# Allegro board RAK833_RPIGATEWAY.brd
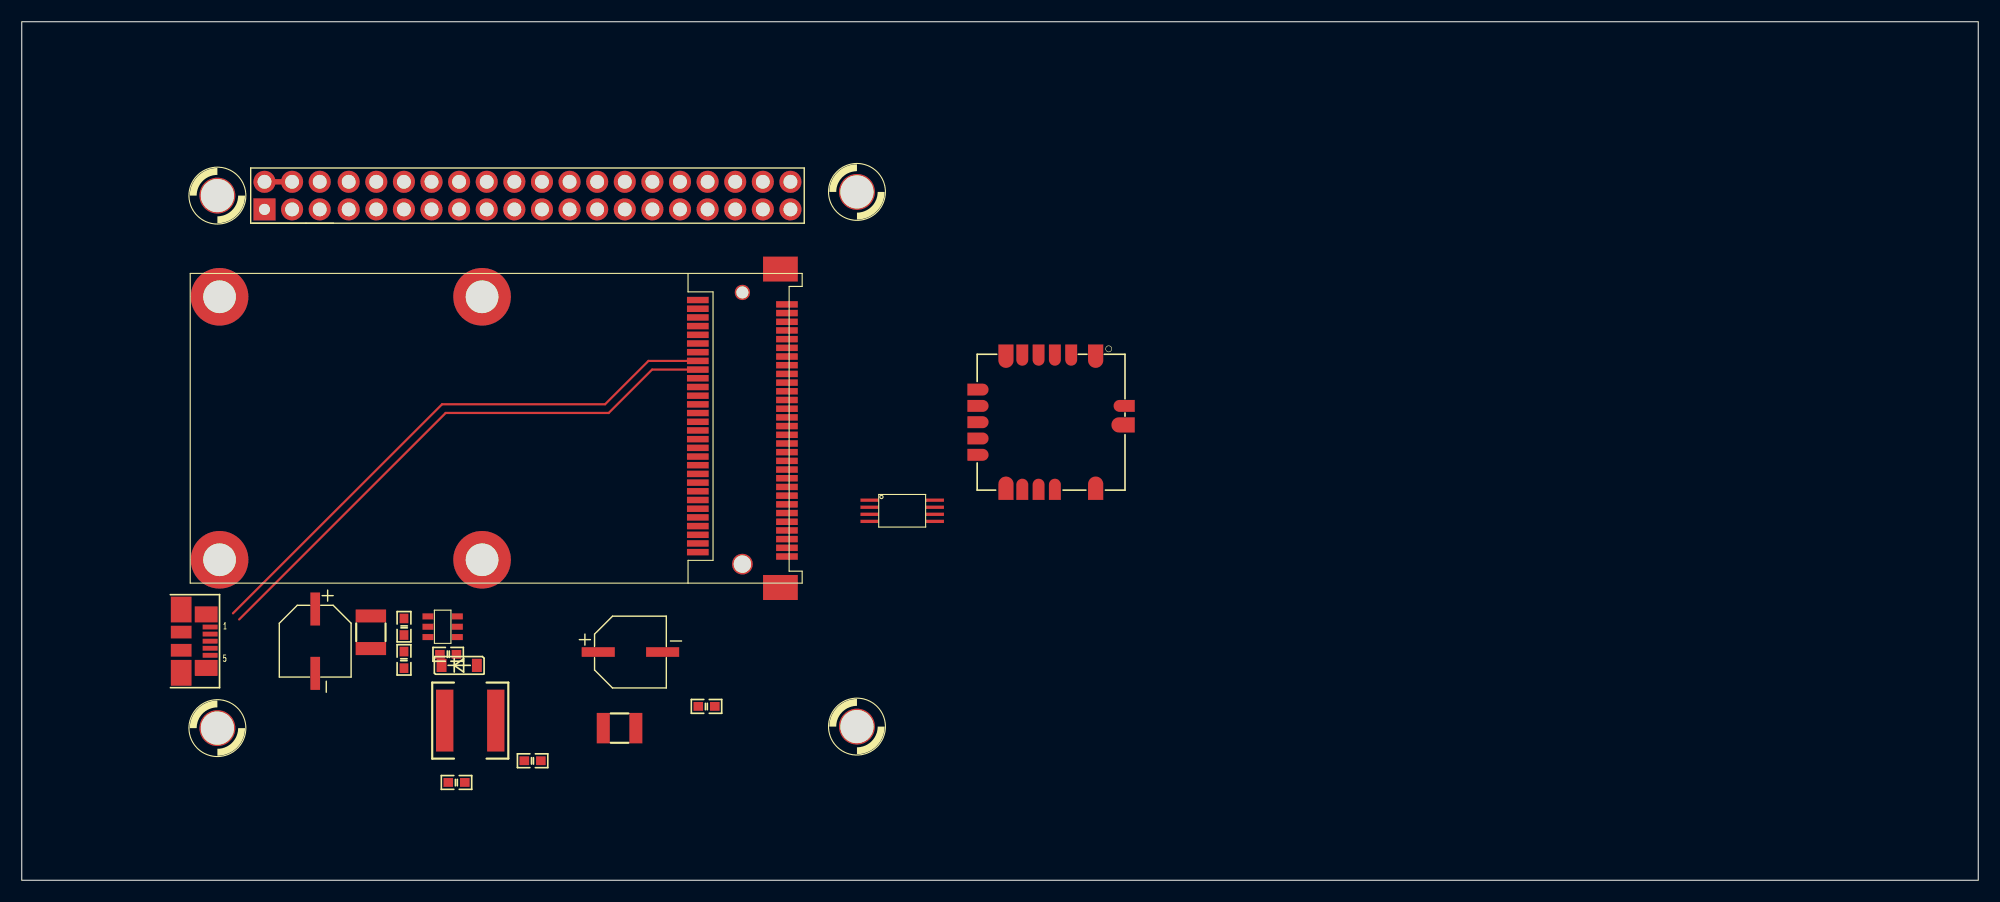
[diagram p0: board, top side]
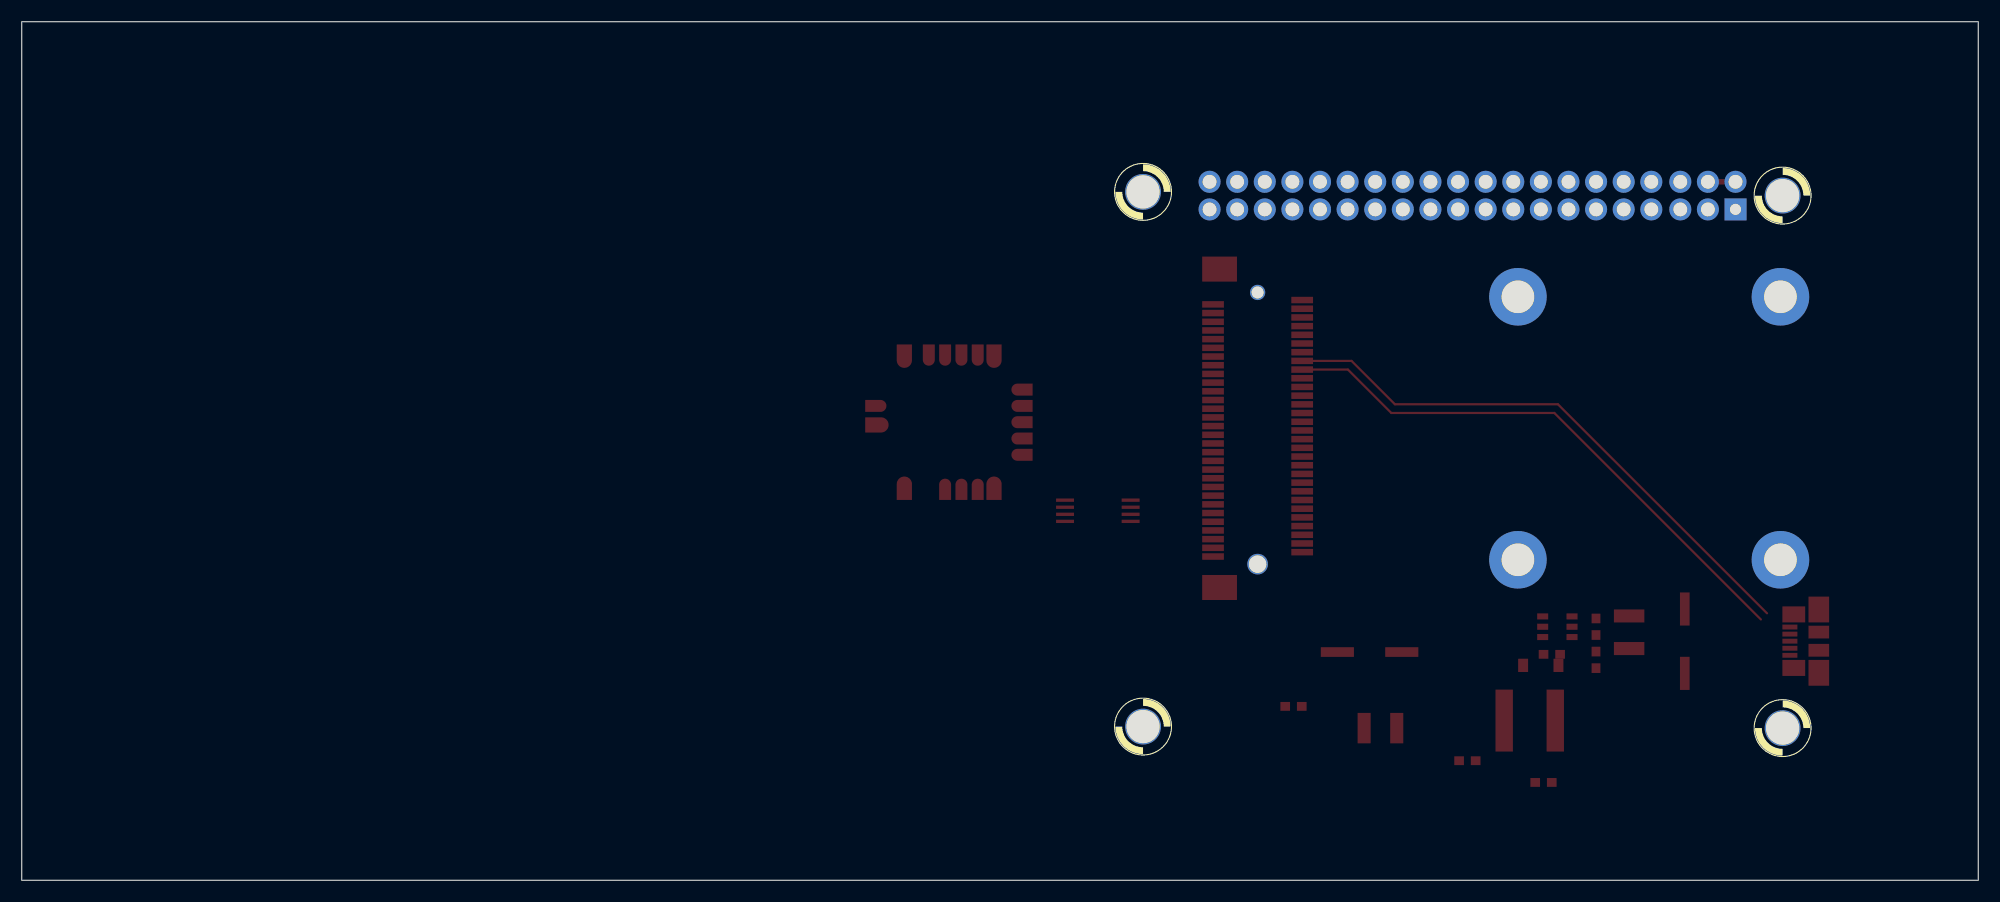
[diagram p1: board, bottom side, seen from below]

Outline 180 x 79 mm; copper layers: TOP, BOTTOM. Coordinates in mm from the lower left corner of the outline.
Outline path: rectangle 0,0 180,79

## Design rules (mm)
constraint set DEFAULT: min track width 0.203

## Placement (name value [footprint] x y rotation side)
C1  10nF  [C0603]  39.23 20.79 180 top
C2  100uF/35V  [CAP_AL_D]  27 22 270 top
C3  100nF  [C0603]  35.17 20.28 270 top
C4  10u/35V  [CAP_1210]  32.12 22.82 270 top
C5  22u/6.3V  [CAP_1210]  55 14 0 top
C6  220u/16V  [CAP_AL_D]  56 21 0 top
C7  100nF  [C0603]  63 16 0 top
D1  1N5819  [SOD123]  40.25 19.77 0 top
J1  HEADER 20X2  [HEADER40X2PITCH100MIL]  25 63 90 top
J2  HUM011D-5-S  [CON5_MICROUSB_SKT_SM]  16 22 0 top
L1  8.8uH/1.7A  [IND_6X6MM]  41.26 14.69 0 top
MH1  HOLE 4mm  [MH_3MM_1]  18 63 0 top
MH2  HOLE 4mm  [MH_3MM_1]  18 14 0 top
MH3  HOLE 4mm  [MH_3MM_1]  76.84 14.14 0 top
MH4  HOLE 4mm  [MH_3MM_1]  76.84 63.34 0 top
R1  10K  [R0603]  35.17 23.33 90 top
R2  30K  [R0603]  40 9 0 top
R3  10K  [R0603]  47 11 0 top
U1  AP3211  [SOT23-6]  38.72 23.33 180 top
U2  RAK_PCIE  [CONN_PCIE_52POS]  66.3 37.74 90 top
U3  ZM5202  [ZM5202_A]  87 35 0 top
U4  CAT25256  [TSSOP-8]  81 34 0 top

## Library data of the parts
C1 = CAP NP
C2 C6 = CAP
C3 C7 = Cap 0603
C4 C5 = CAP NP: User Part Number: PartNr
D1 = SS34_2
J1 = HEADER 20X2
J2 = USB MIN_6
L1 = INDUCTOR
MH1-MH4 = MOUNTING HOLE
R1-R3 = RES-SM0402_0
U1 = PMIC_SOT23-6
U2 = RAK_PCIE
U3 = ZM5202
U4 = CAT25C02_0

## Footprints (pads in the part's own frame, mm; a bottom-side part is the same pattern mirrored in y, then rotated)
C0603
  rect 0.889x0.813 smd: 1(-0.762,0) 2(0.762,0)
CAP_1210
  rect 1.2x2.8 smd: 1(-1.5,0) 2(1.5,0)
CAP_AL_D
  rect 3.048x0.889 smd: 1(-2.962,0) 2(2.962,0)
CON5_MICROUSB_SKT_SM
  rect 1.38x0.45 smd: 1(1.33,1.3) 2(1.33,0.65) 3(1.33,0) 4(1.33,-0.65) 5(1.33,-1.3)
  rect 1.9x1.175 smd: 6(-1.33,0.837) 11(-1.33,-0.837)
  rect 1.9x2.375 smd: 7(-1.33,2.913) 10(-1.33,-2.913)
  rect 2.1x1.475 smd: 8(0.97,2.463) 9(0.97,-2.463)
CONN_PCIE_52POS
  rect 2.301x3.2 smd: (-10.8,-3.5) (18.499,-3.5)
  round 1.905 hole 1.6 unplated: (-8.651,0)
  round 5.301 hole 3: (-8.25,48.1) (-8.25,23.95) (15.949,48.1) (15.949,23.95)
  round 1.405 hole 1.1 unplated: (16.35,0)
  rect 0.599x1.999 smd: 1(-7.95,-4.1) 2(-7.549,4.1) 3(-7.15,-4.1) 4(-6.749,4.1) 5(-6.35,-4.1) 6(-5.951,4.1) 7(-5.55,-4.1) 8(-5.151,4.1) 9(-4.75,-4.1) 10(-4.351,4.1) 11(-3.95,-4.1) 12(-3.551,4.1) 13(-3.15,-4.1) 14(-2.751,4.1) 15(-2.349,-4.1) 16(-1.951,4.1) 17(1.651,-4.1) 18(2.05,4.1) 19(2.451,-4.1) 20(2.85,4.1) 21(3.251,-4.1) 22(3.65,4.1) 23(4.051,-4.1) 24(4.45,4.1) 25(4.851,-4.1) 26(5.25,4.1) 27(5.652,-4.1) 28(6.05,4.1) 29(6.452,-4.1) 30(6.85,4.1) 31(7.252,-4.1) 32(7.651,4.1) 33(8.052,-4.1) 34(8.451,4.1) 35(8.852,-4.1) 36(9.251,4.1) 37(9.652,-4.1) 38(10.051,4.1) 39(10.452,-4.1) 40(10.851,4.1) 41(11.252,-4.1) 42(11.651,4.1) 43(12.052,-4.1) 44(12.451,4.1) 45(12.852,-4.1) 46(13.251,4.1) 47(13.65,-4.1) 48(14.049,4.1) 49(14.45,-4.1) 50(14.849,4.1) 51(15.25,-4.1) 52(15.649,4.1) A1(-1.549,-4.1) A2(-1.151,4.1) A3(-0.749,-4.1) A4(-0.35,4.1) A5(0.051,-4.1) A6(0.45,4.1) A7(0.851,-4.1) A8(1.25,4.1)
HEADER40X2PITCH100MIL
  rect 2.032x2.032 hole 1.016: 1(-1.27,2.667)
  round 2.032 hole 1.27: 2(1.27,2.667) 3(-1.27,0.127) 4(1.27,0.127) 5(-1.27,-2.413) 6(1.27,-2.413) 7(-1.27,-5.08) 8(1.27,-5.08) 9(-1.27,-7.62) 10(1.27,-7.62) 11(-1.27,-10.16) 12(1.27,-10.16) 13(-1.27,-12.7) 14(1.27,-12.7) 15(-1.27,-15.24) 16(1.27,-15.24) 17(-1.27,-17.78) 18(1.27,-17.78) 19(-1.27,-20.32) 20(1.27,-20.32) 21(-1.27,-22.86) 22(1.27,-22.86) 23(-1.27,-25.4) 24(1.27,-25.4) 25(-1.27,-27.94) 26(1.27,-27.94) 27(-1.27,-30.48) 28(1.27,-30.48) 29(-1.27,-33.02) 30(1.27,-33.02) 31(-1.27,-35.56) 32(1.27,-35.56) 33(-1.27,-38.1) 34(1.27,-38.1) 35(-1.27,-40.64) 36(1.27,-40.64) 37(-1.27,-43.18) 38(1.27,-43.18) 39(-1.27,-45.72) 40(1.27,-45.72)
IND_6X6MM
  rect 1.6x5.7 smd: 1(-2.35,0) 2(2.35,0)
MH_3MM_1
  round 3.302 hole 3.048: 1(0,0)
R0603
  rect 0.889x0.813 smd: 1(-0.762,0) 2(0.762,0)
SOD123
  rect 0.914x1.219 smd: 1(1.626,0) 2(-1.626,0)
SOT23-6
  rect 1.016x0.559 smd: 1(-1.35,0.95) 2(-1.35,0) 3(-1.35,-0.95) 4(1.35,-0.95) 5(1.35,0) 6(1.35,0.95)
TSSOP-8
  rect 1.651x0.305 smd: 1(-3.017,0.975) 2(-3.017,0.325) 3(-3.017,-0.325) 4(-3.017,-0.975) 5(3.017,-0.975) 6(3.017,-0.325) 7(3.017,0.325) 8(3.017,0.975)
ZM5202_A
  custom 1.4x2.15 smd: 1(11.8,13.225) 6(3.55,13.225) 12(3.55,1.075) 16(11.8,1.075)
  custom 1.1x1.95 smd: 2(9.55,13.325) 3(8.05,13.325) 4(6.55,13.325) 5(5.05,13.325) 13(5.05,0.975) 14(6.55,0.975) 15(8.05,0.975)
  custom 1.95x1.1 smd: 7(0.975,10.15) 8(0.975,8.65) 9(0.975,7.15) 10(0.975,5.65) 11(0.975,4.15) 18(14.425,8.65)
  custom 2.15x1.4 smd: 17(14.325,6.9)

## Nets
3.3V: U2.2 U2.24 U2.39 U2.41 U2.52
3V3: C5.1 C6.1 C7.1 L1.2 R2.2
GND: C2.2 C3.2 C4.2 C5.2 C6.2 C7.2 D1.1 J1.7 J2.5 J2.6 J2.7 J2.8 J2.9 J2.10 J2.11 R3.2 U1.2 U2.4 U2.9(PIN9) U2.15 U2.18 U2.21 U2.26 U2.27 U2.29 U2.34 U2.35 U2.37 U2.40 U2.43 U2.50 U3.1 U3.6 U3.12 U3.16 U3.17 U4.4
VCC3.3V: J1.1 U3.11 U4.3(W\P\) U4.7 U4.8
VCC5V: C2.1 C3.1 C4.1 R1.1 U1.5
EXTERNALGPS: U2.19
LED: U3.5
RF: U3.18
RPI_5V: J1.2 J1.4
SPDT_SEL: U2.17
SPI_CE: J1.22 U2.51
SPI_CLK: J1.21 U2.45
SPI_MISO: J1.19 U2.47
SPI_MOSI: J1.17 U2.49
SPI_RST: J1.37 U2.22
USB_D+: U2.38
USB_D-: U2.36
USB_DM: J2.2
USB_DP: J2.3
ZM_INT0: U3.3
ZM_INT1: U3.4
ZM_RESET: J1.12
ZM_RX: J1.8 U3.10
ZM_TX: J1.10 U3.15
ZWAVE_SPI_CS: U3.14(ZEROX) U4.1
ZWAVE_SPI_MISO: U3.7 U4.2
ZWAVE_SPI_MOSI: U3.9 U4.5
ZWAVE_SPI_SCLK: U3.8 U4.6
N7996678: C1.1 U1.1
N7996682: C1.2 D1.2(CATHODE) L1.1 U1.6(SW)
N7996842: R1.2 U1.4
N7996854: R2.1 R3.1 U1.3
N7997918: U3.2
N7999815: J2.1
N7999903: J2.4(ID)

Pads without a net: J1 3 5 6 9 11 13 14 15 16 18 20 23 24 25 26 27 28 29 30 31 32 33 34 35 36 38 39 40; MH1 1; MH2 1; MH3 1; MH4 1; U2 1 3 5 6 7 8 10 11 12 13 14 16 20 23 25 28 30 31 32 33 42 44 46 48 A1 A2 A3 A4 A5 A6 A7 A8; U3 13

## Routing (per net, layer and track width the routed paths; a pad name or vN(x,y) marks a point on that pad's centre or on a via; arc(x,y) is an arc through that point)
RPI_5V: length 2.5
  TOP w0.508: J1.4 J1.2
USB_D+: length 52.4
  TOP w0.203: 19.43,24.57 38.67,43.8 53.67,43.8 57.66,47.79 U2.38
USB_D-: length 51.7
  TOP w0.203: 20,24 39,43 54,43 57.99,46.99 U2.36
